# Altium PCB main.PcbDoc (part 1 of 2)
Units mm, origin at the board's own origin, x right, y up, seen from the top; angles counter-clockwise.
Board outline 40.5 x 55.75 mm, 4 copper layers (Top Layer, Int1, Int2, Bottom Layer), stack 1.334 mm thick; 84 components, 154 nets, 493 pads, 303 vias.
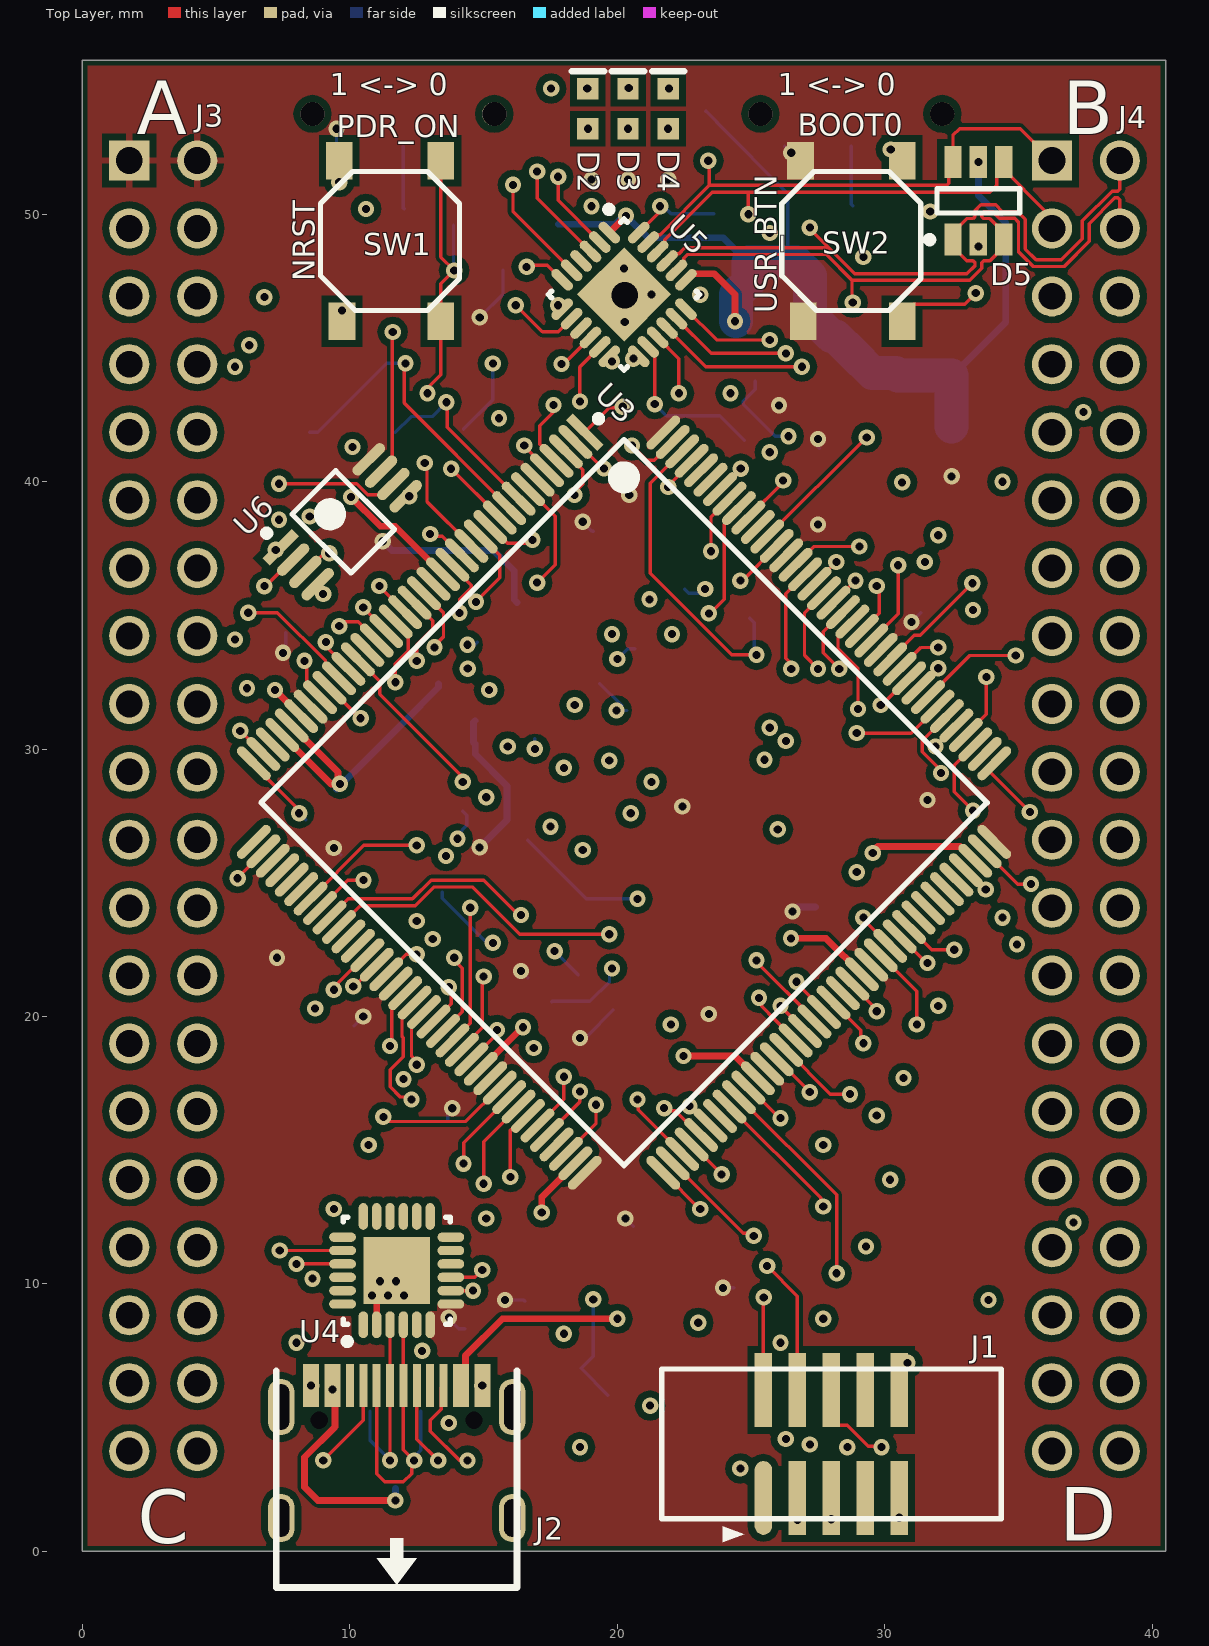
[diagram p0: Top Layer view]
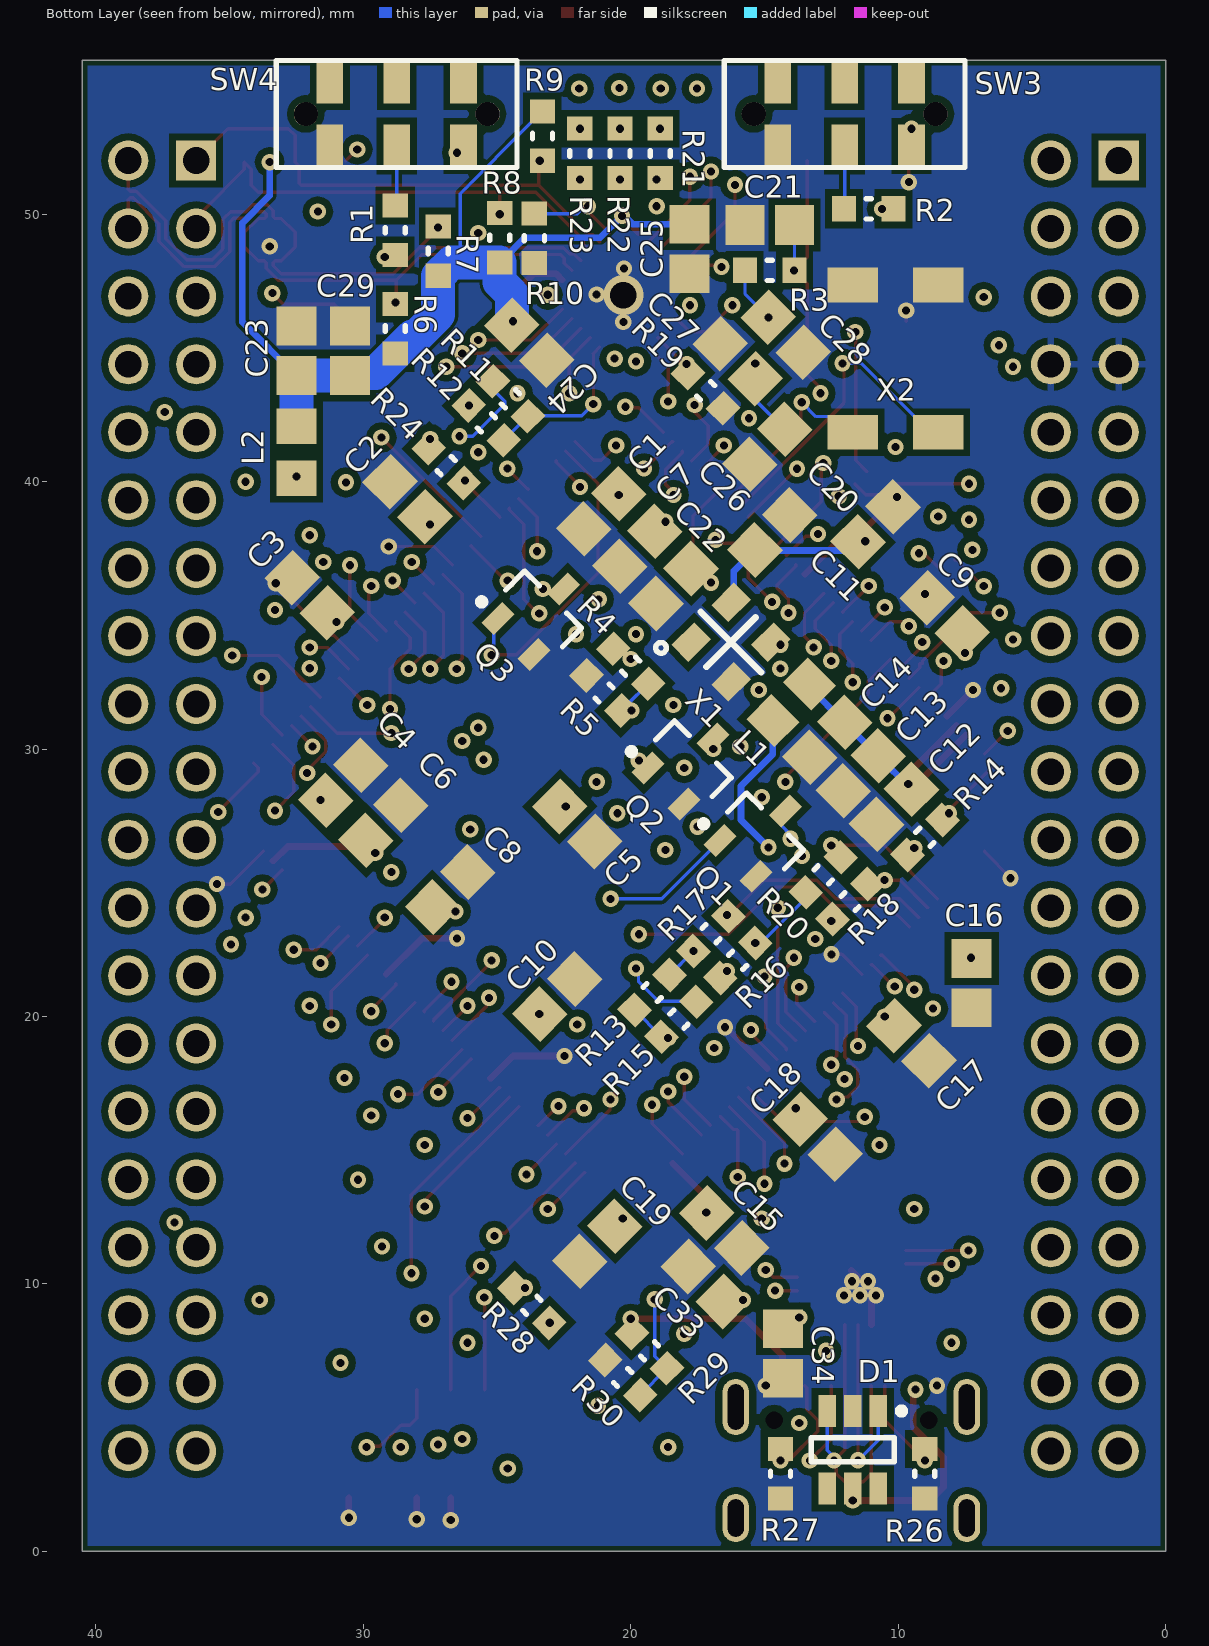
[diagram p1: Bottom Layer view, seen from below]
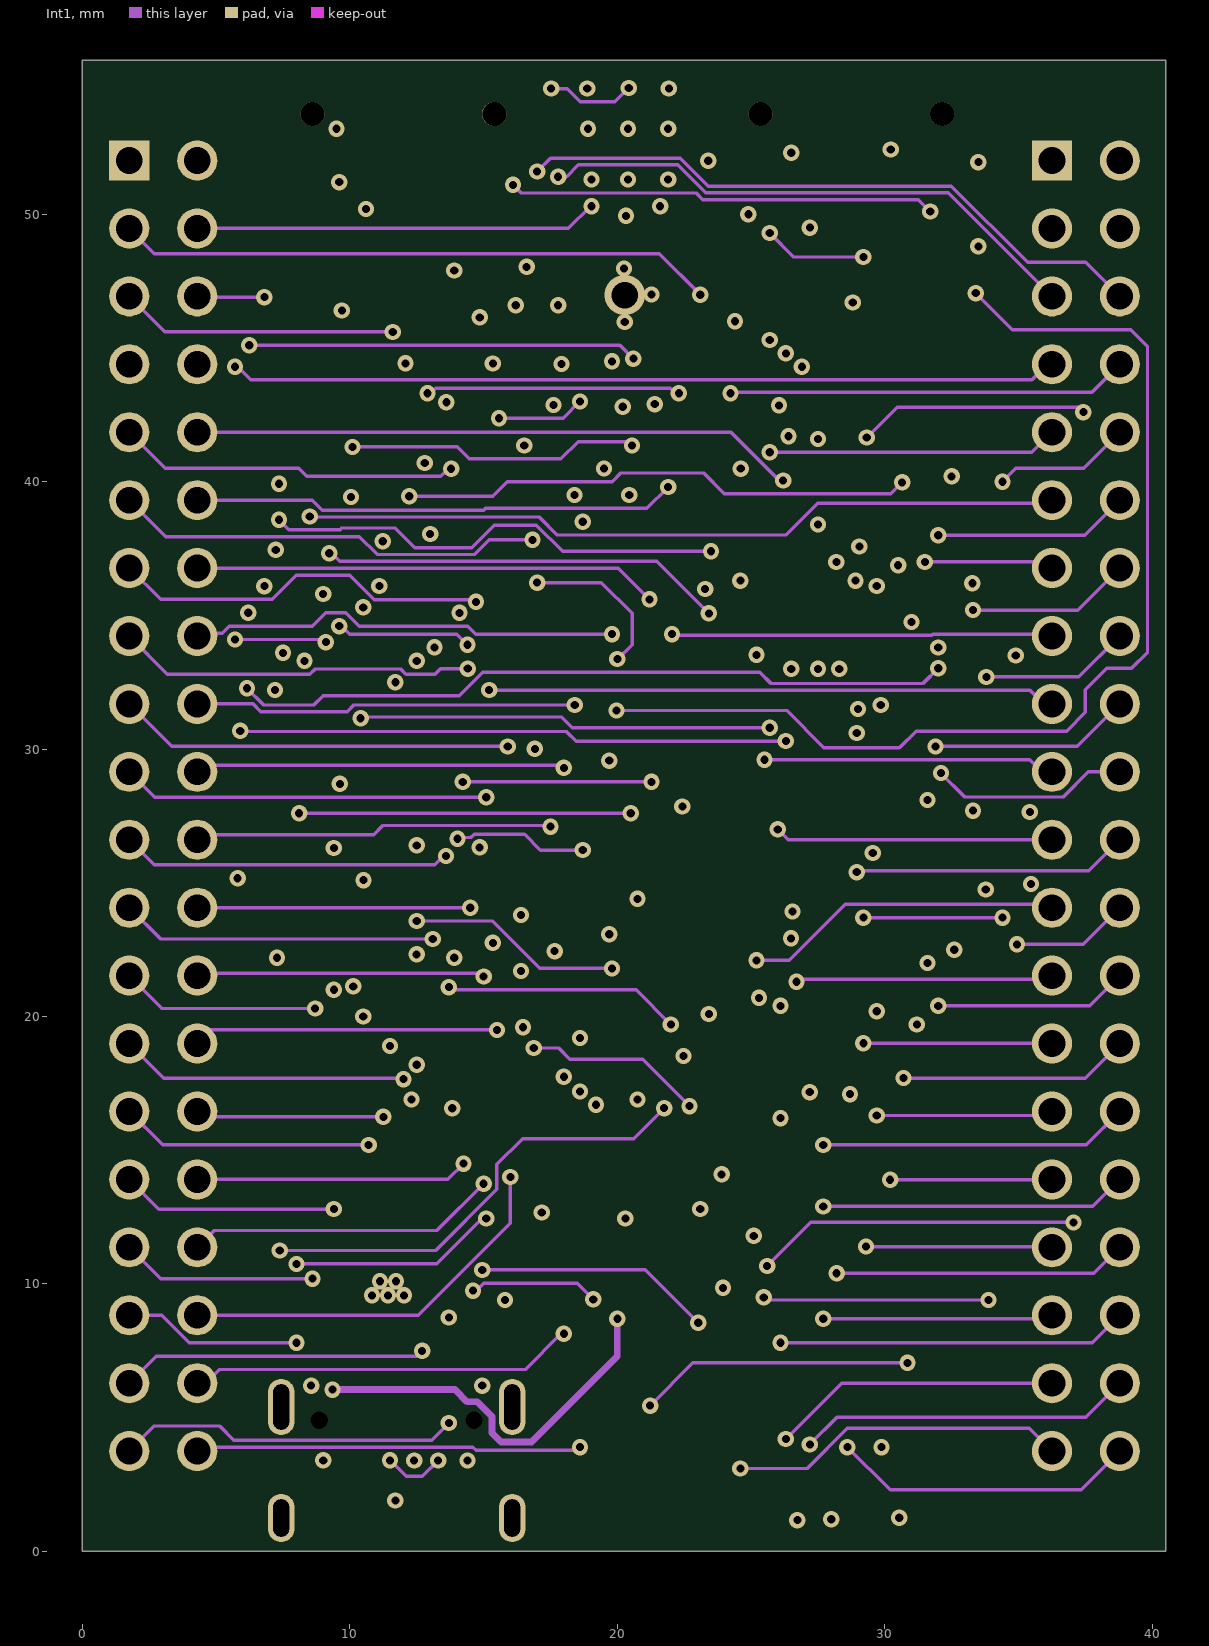
[diagram p2: Int1]
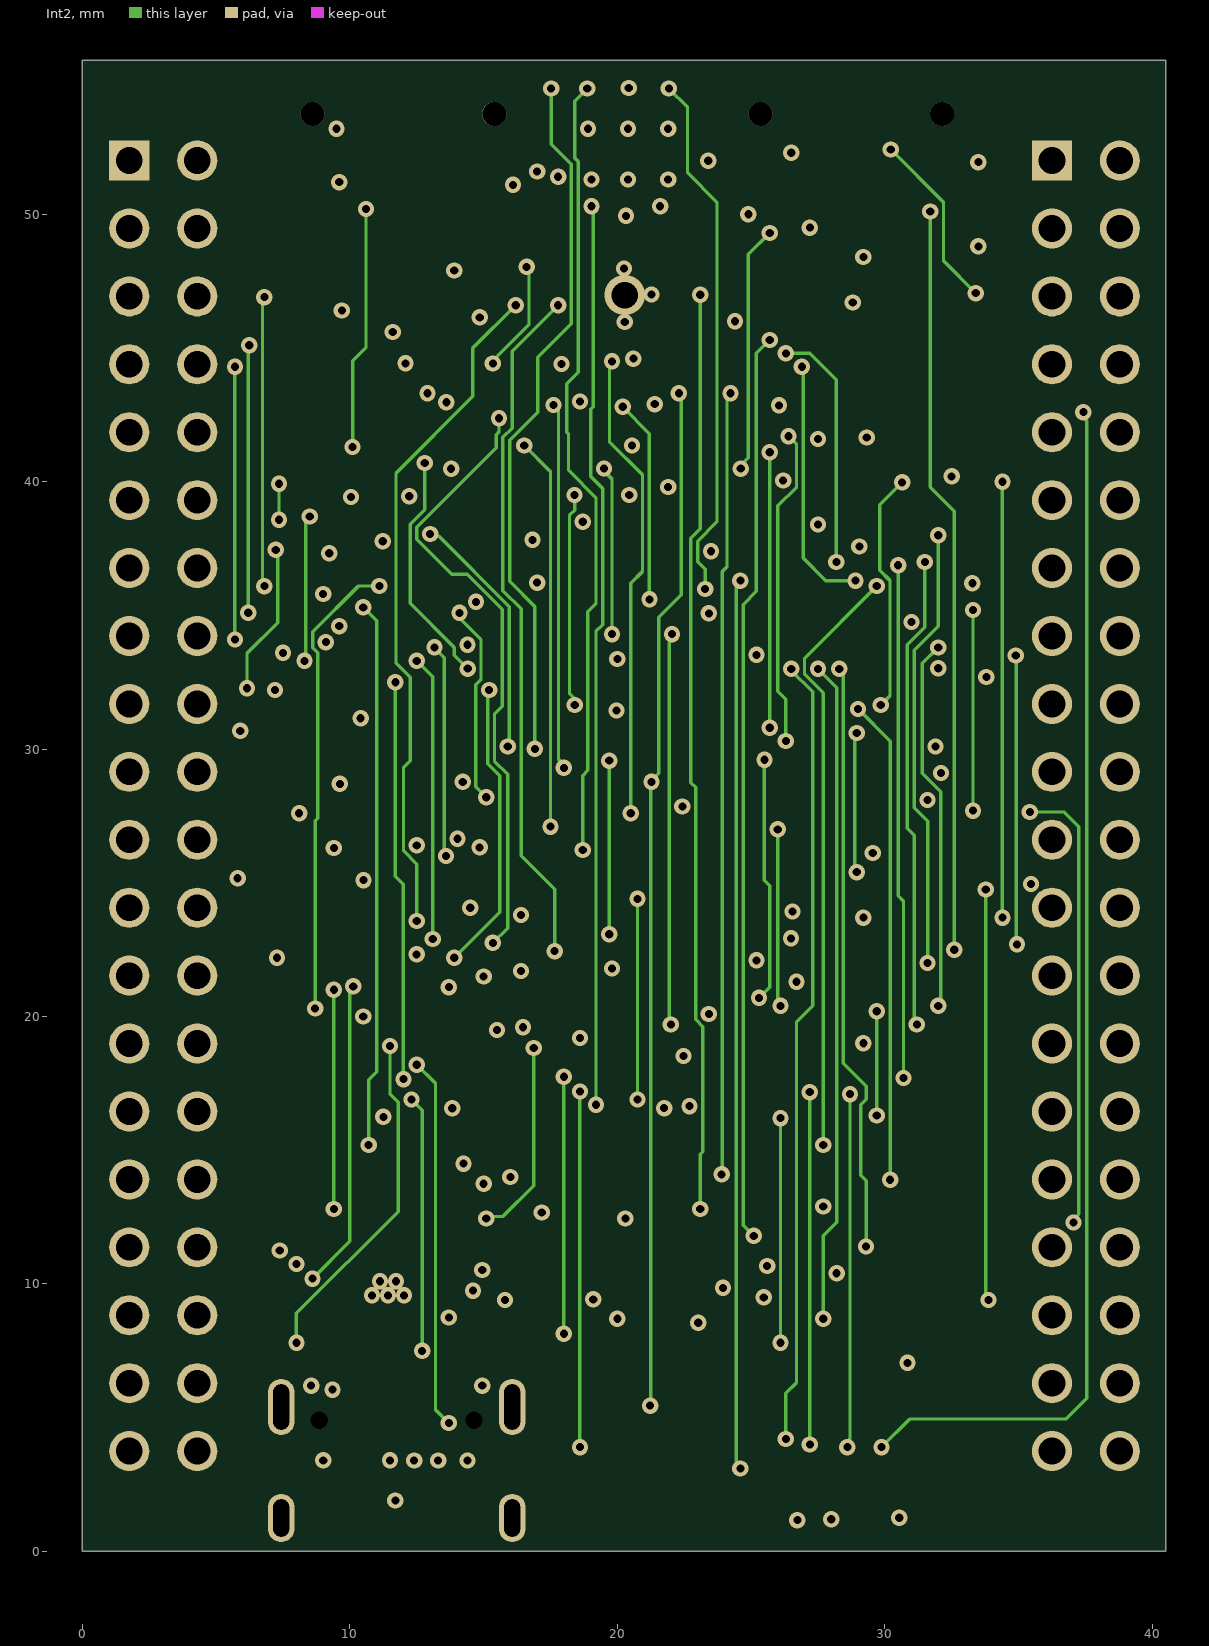
[diagram p3: Int2]
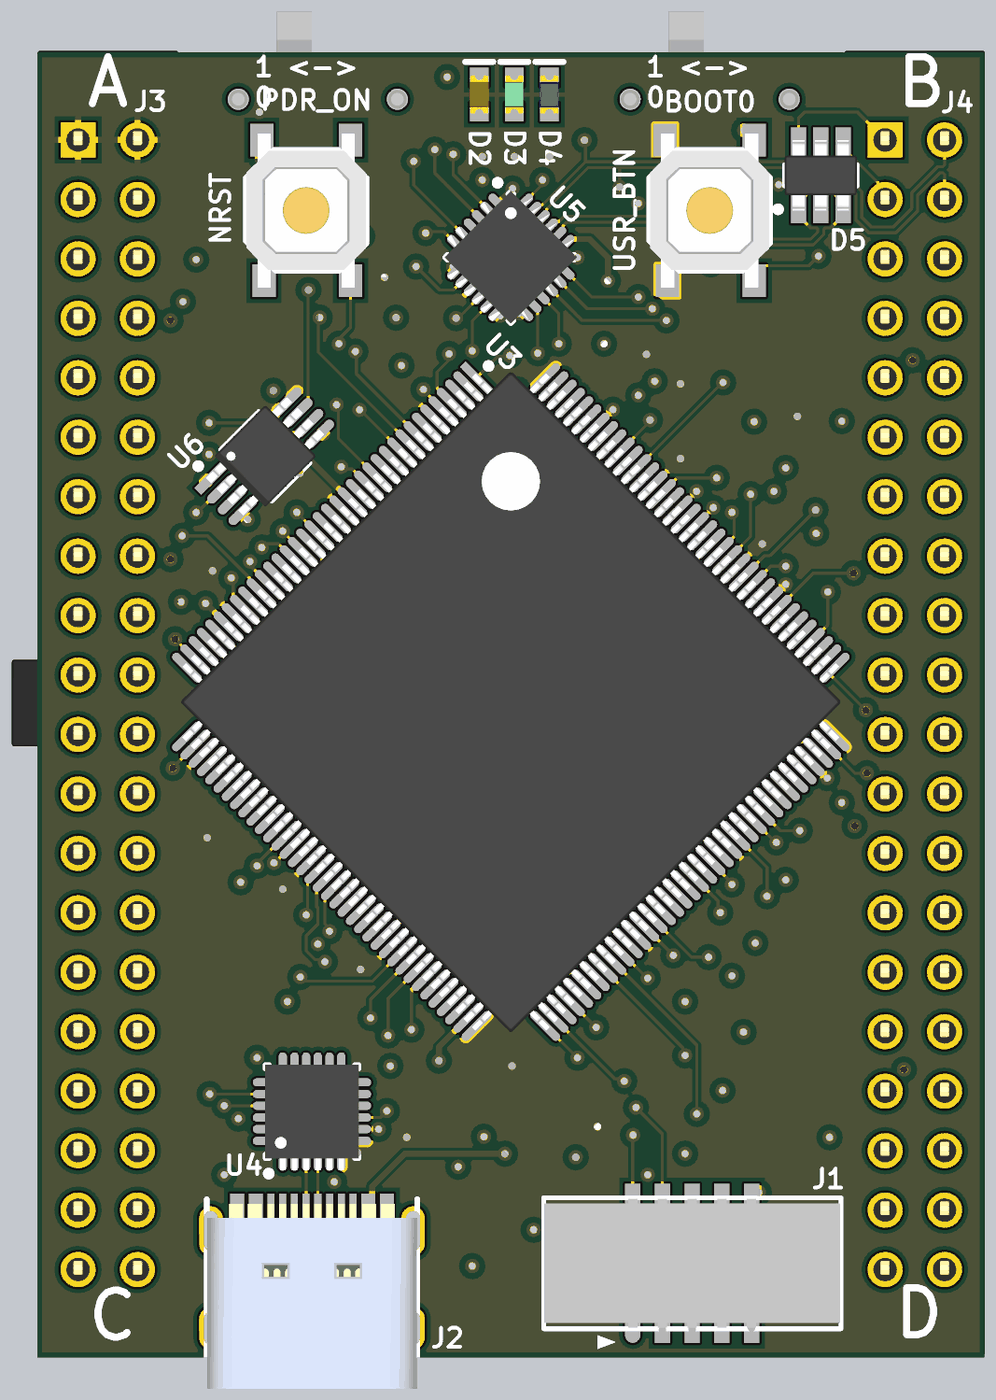
[diagram p5: 3D render of the assembled board from above, using the file's embedded part models]
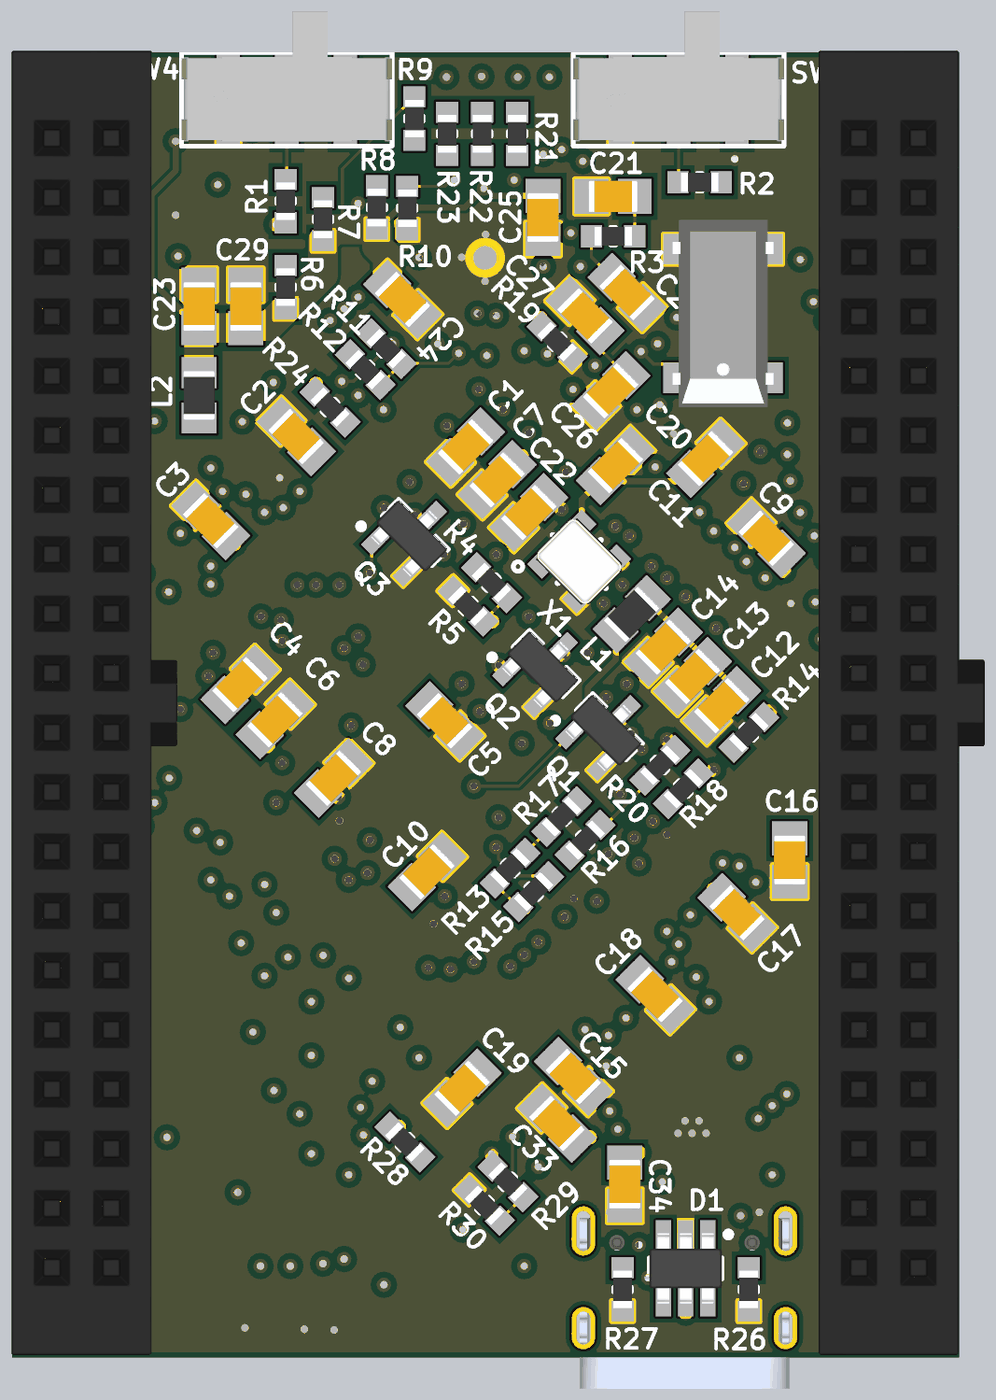
[diagram p6: 3D render of the assembled board from below, using the file's embedded part models]

## Layer stack, top to bottom
Top Solder: solder mask 0.0254, SM-001, Dk 4
Top Layer: signal copper 0.035
Dielectric 1: prepreg 0.1295, PP-017, Dk 4.3
Dielectric 2: prepreg 0.1295, PP-017, Dk 4.3
Int1: signal copper 0.0175
Dielectric 3: core 0.7112, Core-039, Dk 4.8
Int2: signal copper 0.0175
Dielectric 4: prepreg 0.1295, PP-017, Dk 4.3
Dielectric 5: prepreg 0.1295, PP-017, Dk 4.3
Bottom Layer: signal copper 0.035
Bottom Solder: solder mask 0.0254, SM-001, Dk 4

## Board outline
0,0 0,55.75 40.5,55.75 40.5,0

## Design rules (kind name [scope] priority, off if disabled: settings)
BoardOutlineClearance JLC_BoardOutlineClearance_Silk [OnLayer('Top Overlay')  or   OnLayer('Bottom Overlay')] p1: gap=0 ignorepadtopadclearanceinfootprint=FALSE
BoardOutlineClearance JLC_BoardOutlineClearance_Single [All] p2: gap=0.4 ignorepadtopadclearanceinfootprint=FALSE except(0: Arc-SplitContinuation Track-SplitContinuation SMDPad-SplitContinuation THPad-SplitContinuation Via-SplitContinuation Fill-SplitContinuation Poly-SplitContinuation Region-SplitContinuation Text-SplitContinuation; 0.2: Arc-OutlineEdge Track-OutlineEdge SMDPad-OutlineEdge THPad-OutlineEdge Via-OutlineEdge Fill-OutlineEdge Poly-OutlineEdge Region-OutlineEdge Text-OutlineEdge)
BoardOutlineClearance JLC_BoardOutlineClearance_Panel [All] p3: gap=0.4 ignorepadtopadclearanceinfootprint=FALSE except(0: Arc-SplitContinuation Track-SplitContinuation SMDPad-SplitContinuation THPad-SplitContinuation Via-SplitContinuation Fill-SplitContinuation Poly-SplitContinuation Region-SplitContinuation Text-SplitContinuation)
Clearance JLC_Clearance_SB [(HasFootprint('0603 Solder Bridge-Footprint-1'))] p1: gap=0.127 ignorepadtopadclearanceinfootprint=FALSE except(0: Fill-Hole Poly-Hole Region-Hole Text-Hole; 0.254: SMDPad-Fill SMDPad-Poly SMDPad-Region THPad-Fill THPad-Poly THPad-Region Via-Fill Via-Poly Via-Region)
Clearance JLC_Clearance_Top [All] p2: gap=0.127 ignorepadtopadclearanceinfootprint=FALSE except(0: Fill-Hole Poly-Hole Region-Hole Text-Hole; 0.254: SMDPad-Fill SMDPad-Poly SMDPad-Region THPad-Fill THPad-Poly THPad-Region Via-Fill Via-Poly Via-Region Fill-Fill Fill-Poly Fill-Region Poly-Poly Poly-Region Region-Region)
ComponentClearance JLC_ComponentClearance [All] p1: gap=0 collisioncheckmode=3 verticalgap=0 showdistances=FALSE
ComponentOrientations JLC_ComponentOrientations [All] p1: allowedrotations=32
DiffPairsRouting [All] p1: maxlimit=0.254 minlimit=0.127 mostfreqgap=0.127 toplayer_minwidth=0.127 toplayer_maxwidth=0.381 toplayer_prefwidth=0.127 midlayer1_minwidth=0.127 midlayer1_maxwidth=0.381 midlayer1_prefwidth=0.127 midlayer2_minwidth=0.127 midlayer2_maxwidth=0.381 midlayer2_prefwidth=0.127 bottomlayer_minwidth=0.127 bottomlayer_maxwidth=0.381 bottomlayer_prefwidth=0.127 maxuncoupledlength=12.7
Height JLC_Height [All] p1: minheight=0 maxheight=2539.975 prefheight=12.7
HoleSize JLC_HoleSize [All] p1: absolutevalues=TRUE maxlimit=1000 minlimit=0.305 maxpercent=80.000 minpercent=20.000
HoleToHoleClearance JLC_HoleToHoleClearance [All] p1: gap=0.305 allowstackedmicrovias=TRUE
MinimumAnnularRing JLC_MinimumAnnularRing [All] p1: minimumring=0.076
MinimumSolderMaskSliver JLC_MinimumSolderMaskSliver [All] p1: minsoldermaskwidth=0
PolygonConnect [All] p1: connectstyle=Relief reliefconductorwidth=0.254 reliefentries=4 polygonreliefangle="90 Angle" airgapwidth=0.254
RoutingVias JLC_RoutingVias [All] p1: holewidth=0.381 width=0.635 viastyle="Through Hole" minholewidth=0.305 minwidth=0.61 maxholewidth=6.299 maxwidth=12.7
SilkToSilkClearance JLC_SilkToSilkClearance [All] p1: silktosilkclearance=0
SilkToSolderMaskClearance JLC_SilkToSolderMaskClearance [IsPad] p1: minsilkscreentomaskgap=0 clearancetoexposedcopper=TRUE
SolderMaskExpansion [All] p1: expansion=0.102 istentingtop=FALSE
Width JLC_Width [All] p1: maxlimit=12.7 minlimit=0.127 preferedwidth=0.254
22 further rules are at their usual default settings.

## Classes and differential pairs
component class vcp: C33 C34 D1 J2 R26 R27 R28 R29 R30 U4
component class mcu: C1 C2 C3 C4 C5 C6 C7 C8 C9 C10 C11 C12 C13 C14 C15 C16 C17 C18 C19 C20 C21 C22 D2 D3 D4 J1 L1 Q1 Q2 Q3 R1 R2 R3 R4 R5 R21 R22 R23 SW1 SW2 SW3 SW4 U3 X1 X2
component class header: J3 J4
component class eth: C23 C24 C25 C26 C27 C28 C29 D5 L2 R6 R7 R8 R9 R10 R11 R12 R13 R14 R15 R16 R17 R18 R19 R20 U5
component class bkpln: R24 U6
differential pair TD: +TD_P -TD_N
differential pair RD: +RD_P -RD_N

## Components (designator, comment, footprint, x,y, rotation, side; value= is the part's Value field where it differs from the comment)
C1 "100nF" "CAP 0805 L" 21.1,38.9 r315 bottom
C2 "100nF" "CAP 0805 L" 28.346,39.346 r45 bottom
C3 "100nF" "CAP 0805 L" 32,35.75 r45 bottom
C4 "100nF" "CAP 0805 L" 30.75,28.75 r135 bottom
C5 "4u7F" "CAP 0805 L" 22,27.2 r225 bottom
C6 "2u2F" "CAP 0805 L" 29.25,27.25 r135 bottom
C7 "1uF" "CAP 0805 L" 19.75,37.5 r135 bottom
C8 "100nF" "CAP 0805 L" 26.75,24.75 r135 bottom
C9 "100nF" "CAP 0805 L" 8.25,35 r225 bottom
C10 "100nF" "CAP 0805 L" 22.75,20.75 r135 bottom
C11 "100nF" "CAP 0805 L" 10.846,38.404 r315 bottom
C12 "100nF" "CAP 0805 L" 10.154,27.846 r135 bottom
C13 "2uF" "CAP 0805 L" 11.404,29.096 r135 bottom
C14 "10nF" "CAP 0805 L" 12.654,30.346 r135 bottom
C15 "2u2F" "CAP 0805 L" 16.5,12 r45 bottom
C16 "100nF" "CAP 0805 L" 7.25,21.25 r90 bottom
C17 "100nF" "CAP 0805 L" 9.5,19 r45 bottom
C18 "100nF" "CAP 0805 L" 13,15.5 r45 bottom
C19 "100nF" "CAP 0805 L" 21.25,11.5 r135 bottom
C20 "100nF" "CAP 0805 L" 14.7,38.1 r135 bottom
C21 "100nF" "CAP 0805 L" 14.8,49.6 r0 bottom
C22 "100nF" "CAP 0805 L" 18.4,36.1 r135 bottom
C23 "10uF" "CAP 0805 L" 32.5,44.9 r270 bottom
C24 "100nF" "CAP 0805 L" 23.8,45.2 r225 bottom
C25 "100nF" "CAP 0805 L" 17.8,48.7 r270 bottom
C26 "470pF" "CAP 0805 L" 14.9,41.3 r135 bottom
C27 "1uF" "CAP 0805 L" 16,44.5 r225 bottom
C28 "100nF" "CAP 0805 L" 14.2,45.5 r45 bottom
C29 "100nF" "CAP 0805 L" 30.5,44.9 r270 bottom
C33 "4u7" "CAP 0805 L" 17.2,10 r225 bottom
C34 "100n" "CAP 0805 L" 14.3,7.4 r90 bottom
D1 "TVS Steering" SC-74 11.7,3.8 r270 bottom
D2 "RED" "LED 0603 RED" 18.9,53.95 r270 top
D3 "GREEN" "LED 0603 GREEN" 20.4,53.95 r270 top
D4 "BLUE" "LED 0603 BLUE" 21.9,53.95 r270 top
D5 "TVS Steering" SC-74 33.5,50.5 r90 top
J1 "SWD" "CONN IDC 10P P0.05" 25.46,4.02 r0 top
J2 "CONN USB C 12p" "CONN USB C 12P" 11.75,1.25 r0 top
J3 "2x20 F" "CONN HDR 2x20 F BOT" 1.75,52.01 r0 top
J4 "2x20 F" "CONN HDR 2x20 F BOT" 36.25,52.01 r0 top
L1 "22uH" "IND 0805 L" 14,31.75 r315 bottom
L2 "22uH" "IND 0805 L" 32.5,41.1 r270 bottom
Q1 "60V 360mA 0R9" SOT23 15.1,26.8 r135 bottom
Q2 "60V 360mA 0R9" SOT23 17.8,29.5 r135 bottom
Q3 "60V 360mA 0R9" SOT23 23.4,35.1 r135 bottom
R1 "10K" "RES 0603 L" 28.8,49.4 r90 bottom
R2 "10K" "RES 0603 L" 11.1,50.2 r0 bottom
R3 "10K" "RES 0603 L" 14.8,47.9 r0 bottom
R4 "10K" "RES 0603 L" 20,33.1 r225 bottom
R5 "10K" "RES 0603 L" 21,32.1 r225 bottom
R6 "49R9" "RES 0603 L" 28.8,45.725 r270 bottom
R7 "49R9" "RES 0603 L" 27.2,48.625 r270 bottom
R8 "49R9" "RES 0603 L" 24.9,49.125 r270 bottom
R9 "49R9" "RES 0603 L" 23.3,52.925 r90 bottom
R10 "12k1" "RES 0603 L" 23.6,49.1 r90 bottom
R11 "33" "RES 0603 L" 24.5,43.1 r225 bottom
R12 "10k" "RES 0603 L" 25.4,42.2 r45 bottom
R13 "10k" "RES 0603 L" 19.2,20.9 r315 bottom
R14 "1k5" "RES 0603 L" 9,26.7 r135 bottom
R15 "10k" "RES 0603 L" 18.2,19.9 r315 bottom
R16 "10k" "RES 0603 L" 16,22.1 r315 bottom
R17 "33" "RES 0603 L" 17,23.1 r315 bottom
R18 "33" "RES 0603 L" 11.8,24.3 r315 bottom
R19 "10k" "RES 0603 L" 17.2,43.4 r45 bottom
R20 "33" "RES 0603 L" 12.8,25.3 r315 bottom
R21 "330" "RES 0603 L" 18.9,52.275 r270 bottom
R22 "330" "RES 0603 L" 20.4,52.275 r270 bottom
R23 "330" "RES 0603 L" 21.9,52.275 r270 bottom
R24 "10k" "RES 0603 L" 26.9,40.6 r45 bottom
R26 "10k" "RES 0603 L" 9,2.9 r270 bottom
R27 "10k" "RES 0603 L" 14.4,2.9 r90 bottom
R28 "1k" "RES 0603 L" 23.7,9.2 r225 bottom
R29 "22.1k" "RES 0603 L" 19.3,7.5 r225 bottom
R30 "47.5k" "RES 0603 L" 20.3,6.5 r45 bottom
SW1 "SW Flat 5mm Tactile" "SW 5MM TACTILE" 11.5,49 r90 top
SW2 "SW Flat 5mm Tactile" "SW 5MM TACTILE" 28.75,49 r90 top
SW3 "slide dpdt" "SW SIDE SLIDE DPDT" 12,53.75 r0 bottom
SW4 "slide dpdt" "SW SIDE SLIDE DPDT" 28.75,53.75 r0 bottom
U3 "STM32H753ZIT6" LQFP144 20.25,28 r315 top
U4 "CP2102N" VQFN24 11.75,10.5 r90 top
U5 "LAN8742A" VQFN24 20.25,47 r315 top
U6 "TCA4311A" SSOP-8 9.75,38.5 r45 top
X1 "DSC6011CI2A-008.0000" "XO 3.2x2.5" 16.25,34 r135 bottom
X2 "32.768kHz" "XTAL 8.0x3.8" 10.1,44.6 r90 bottom

## Footprints (in the part's own frame and the unit in brackets; to place one, negate y for a bottom-side part, rotate by r counter-clockwise, add the part's x,y. Pads: shape width x height; smd on the part's side, far side on the other; paste and mask are expansions set on the pad)
"CAP 0805 L" [mm] "Chip Capacitor, 2-Leads, Body 2.00x1.25mm, IPC Low Density"
  rect 1.45x1.5 smd: 1(-0.925,0) 2(0.925,0)
  body extent -1.05,-0.68 1.05,0.67, height 1.35
"CONN HDR 2x20 F BOT" [mm]
  rect 1.5x1.5 hole 1: 1(0,0)
  round 1.5 hole 1: 2(2.54,0) 3(0,-2.54) 4(2.54,-2.54) 5(0,-5.08) 6(2.54,-5.08) 7(0,-7.62) 8(2.54,-7.62) 9(0,-10.16) 10(2.54,-10.16) 11(0,-12.7) 12(2.54,-12.7) 13(0,-15.24) 14(2.54,-15.24) 15(0,-17.78) 16(2.54,-17.78) 17(0,-20.32) 18(2.54,-20.32) 19(0,-22.86) 20(2.54,-22.86) 21(0,-25.4) 22(2.54,-25.4) 23(0,-27.94) 24(2.54,-27.94) 25(0,-30.48) 26(2.54,-30.48) 27(0,-33.02) 28(2.54,-33.02) 29(0,-35.56) 30(2.54,-35.56) 31(0,-38.1) 32(2.54,-38.1) 33(0,-40.64) 34(2.54,-40.64) 35(0,-43.18) 36(2.54,-43.18) 37(0,-45.72) 38(2.54,-45.72) 39(0,-48.26) 40(2.54,-48.26)
  body extent -2.83,-51.91 4.27,3.81, height 2.8
"CONN IDC 10P P0.05" [mm]
  oval 0.65x2.76 smd: 1(0,-2.02)
  rect 0.65x2.76 smd: 2(0,2.02) 3(1.27,-2.02) 4(1.27,2.02) 5(2.54,-2.02) 6(2.54,2.02) 7(3.81,-2.02) 8(3.81,2.02) 9(5.08,-2.02) 10(5.08,2.02)
  silkscreen extent -3.8,-3.67 8.9,2.8, body extent -3.78,-2.75 8.87,2.75, height 5.61
"CONN USB C 12P" [mm]
  rect 0.6x1.6 smd: A1/B12(-3.2,4.95) A4/B9(-2.4,4.95) A9/B4(2.4,4.95) A12/B1(3.2,4.95)
  rect 0.3x1.6 smd: A5(-1.25,4.95) A6(-0.25,4.95) A7(0.25,4.95) A8(-1.75,4.95) B5(1.75,4.95) B6(0.75,4.95) B7(-0.75,4.95) B8(1.25,4.95)
  oval 1x1.8 hole 0.6 slot 1.4 at 90 deg: ""(-4.32,0) ""(4.32,0)
  oval 1x2.1 hole 0.6 slot 1.7 at 90 deg: ""(-4.32,4.15) ""(4.32,4.15)
  round 0 hole 0.65 unplated: ""(-2.89,3.65) ""(2.89,3.65)
  silkscreen extent -4.5,-2.6 4.5,5.5, body extent -4.47,-2.6 4.47,5.3, height 3.22
"IND 0805 L" [mm] "Chip Inductor, 2-Leads, Body 2.00x1.25mm, IPC Low Density"
  rect 1.32x1.49 smd: 1(-0.97,0) 2(0.97,0)
  body extent -1.05,-0.68 1.05,0.67, height 1.35
"LED 0603 BLUE" [mm]
  rect 0.8x0.8 smd: 1(-0.75,0) 2(0.75,0)
  silkscreen extent -1.4,-0.6 -1.4,0.6, body extent -0.8,-0.39 0.8,0.39, height 0.7
"LED 0603 GREEN" [mm]
  rect 0.8x0.8 smd: 1(-0.75,0) 2(0.75,0)
  silkscreen extent -1.4,-0.6 -1.4,0.6, body extent -0.8,-0.39 0.8,0.39, height 0.7
"LED 0603 RED" [mm]
  rect 0.8x0.8 smd: 1(-0.75,0) 2(0.75,0)
  silkscreen extent -1.4,-0.6 -1.4,0.6, body extent -0.8,-0.39 0.8,0.39, height 0.7
LQFP144 [mm] "TSQFP, 144-Leads, Body 20.00x20.00mm, Pitch 0.50mm, IPC Low Density"
  rect 1.65x0.35 smd: 1(-10.825,8.75)
  oval 1.65x0.35 smd: 2(-10.825,8.25) 3(-10.825,7.75) 4(-10.825,7.25) 5(-10.825,6.75) 6(-10.825,6.25) 7(-10.825,5.75) 8(-10.825,5.25) 9(-10.825,4.75) 10(-10.825,4.25) 11(-10.825,3.75) 12(-10.825,3.25) 13(-10.825,2.75) 14(-10.825,2.25) 15(-10.825,1.75) 16(-10.825,1.25) 17(-10.825,0.75) 18(-10.825,0.25) 19(-10.825,-0.25) 20(-10.825,-0.75) 21(-10.825,-1.25) 22(-10.825,-1.75) 23(-10.825,-2.25) 24(-10.825,-2.75) 25(-10.825,-3.25) 26(-10.825,-3.75) 27(-10.825,-4.25) 28(-10.825,-4.75) 29(-10.825,-5.25) 30(-10.825,-5.75) 31(-10.825,-6.25) 32(-10.825,-6.75) 33(-10.825,-7.25) 34(-10.825,-7.75) 35(-10.825,-8.25) 36(-10.825,-8.75) 73(10.825,-8.75) 74(10.825,-8.25) 75(10.825,-7.75) 76(10.825,-7.25) 77(10.825,-6.75) 78(10.825,-6.25) 79(10.825,-5.75) 80(10.825,-5.25) 81(10.825,-4.75) 82(10.825,-4.25) 83(10.825,-3.75) 84(10.825,-3.25) 85(10.825,-2.75) 86(10.825,-2.25) 87(10.825,-1.75) 88(10.825,-1.25) 89(10.825,-0.75) 90(10.825,-0.25) 91(10.825,0.25) 92(10.825,0.75) 93(10.825,1.25) 94(10.825,1.75) 95(10.825,2.25) 96(10.825,2.75) 97(10.825,3.25) 98(10.825,3.75) 99(10.825,4.25) 100(10.825,4.75) 101(10.825,5.25) 102(10.825,5.75) 103(10.825,6.25) 104(10.825,6.75) 105(10.825,7.25) 106(10.825,7.75) 107(10.825,8.25) 108(10.825,8.75)
  oval 0.35x1.65 smd: 37(-8.75,-10.825) 38(-8.25,-10.825) 39(-7.75,-10.825) 40(-7.25,-10.825) 41(-6.75,-10.825) 42(-6.25,-10.825) 43(-5.75,-10.825) 44(-5.25,-10.825) 45(-4.75,-10.825) 46(-4.25,-10.825) 47(-3.75,-10.825) 48(-3.25,-10.825) 49(-2.75,-10.825) 50(-2.25,-10.825) 51(-1.75,-10.825) 52(-1.25,-10.825) 53(-0.75,-10.825) 54(-0.25,-10.825) 55(0.25,-10.825) 56(0.75,-10.825) 57(1.25,-10.825) 58(1.75,-10.825) 59(2.25,-10.825) 60(2.75,-10.825) 61(3.25,-10.825) 62(3.75,-10.825) 63(4.25,-10.825) 64(4.75,-10.825) 65(5.25,-10.825) 66(5.75,-10.825) 67(6.25,-10.825) 68(6.75,-10.825) 69(7.25,-10.825) 70(7.75,-10.825) 71(8.25,-10.825) 72(8.75,-10.825) 109(8.75,10.825) 110(8.25,10.825) 111(7.75,10.825) 112(7.25,10.825) 113(6.75,10.825) 114(6.25,10.825) 115(5.75,10.825) 116(5.25,10.825) 117(4.75,10.825) 118(4.25,10.825) 119(3.75,10.825) 120(3.25,10.825) 121(2.75,10.825) 122(2.25,10.825) 123(1.75,10.825) 124(1.25,10.825) 125(0.75,10.825) 126(0.25,10.825) 127(-0.25,10.825) 128(-0.75,10.825) 129(-1.25,10.825) 130(-1.75,10.825) 131(-2.25,10.825) 132(-2.75,10.825) 133(-3.25,10.825) 134(-3.75,10.825) 135(-4.25,10.825) 136(-4.75,10.825) 137(-5.25,10.825) 138(-5.75,10.825) 139(-6.25,10.825) 140(-6.75,10.825) 141(-7.25,10.825) 142(-7.75,10.825) 143(-8.25,10.825) 144(-8.75,10.825)
  silkscreen extent -10.95,-9.6 9.6,9.6, body extent -11,-11 11,11, height 1.6
"RES 0603 L" [mm] "Chip Resistor, 2-Leads, Body 1.60x0.80mm, IPC Low Density"
  rect 0.9x0.95 smd: 1(-0.925,0) 2(0.925,0)
  silkscreen extent -0.1,-0.38 0.1,0.38, body extent -0.8,-0.4 0.8,0.4, height 0.45
SC-74 [mm] "SOT23, 6-Leads, Body 3.00x2.75mm, Pitch 0.95mm, IPC Low Density"
  rect 1.2x0.65 smd: 1(-1.45,0.95) 2(-1.45,0) 3(-1.45,-0.95) 4(1.45,-0.95) 5(1.45,0) 6(1.45,0.95)
  silkscreen extent -1.57,-1.55 0.45,1.95, body extent -1.5,-1.55 1.5,1.55, height 1.1
SOT23 [mm] "SOT23, 3-Leads, Body 2.90x2.30mm, Pitch 0.95mm, IPC Low Density"
  rect 1.1x0.65 smd: 1(-1.25,0.95) 2(-1.25,-0.95) 3(1.25,0)
  silkscreen extent -1.37,-1.5 0.7,1.95, body extent -1.3,-1.5 1.3,1.5, height 1.1
SSOP-8 [mm] "TSOP, 8-Leads, Body 3.00x3.00mm, Pitch 0.65mm, IPC Low Density"
  rect 1.55x0.4 smd: 1(-2.325,0.975)
  oval 1.55x0.4 smd: 2(-2.325,0.325) 3(-2.325,-0.325) 4(-2.325,-0.975) 5(2.325,-0.975) 6(2.325,-0.325) 7(2.325,0.325) 8(2.325,0.975)
  silkscreen extent -2.45,-1.55 1.15,1.85, body extent -2.45,-1.55 2.45,1.55, height 1.1
"SW 5MM TACTILE" [mm]
  rect 1.4x1 smd: 1(-3,1.8) 1(3,1.9) 2(-3,-1.9) 2(3,-1.9)
  silkscreen extent -2.6,-2.6 2.6,2.6, body extent -3.29,-2.55 3.29,2.55, height 1.5
"SW SIDE SLIDE DPDT" [mm]
  rect 1x1.6 smd: 1(-2.5,-1.2) 2(0,-1.2) 3(2.5,-1.2) 4(-2.5,1.2) 5(0,1.2) 6(2.5,1.2)
  round 0.9 hole 0.9 unplated: ""(-3.4,0) ""(3.4,0)
  silkscreen extent -4.5,-2 4.5,2, body extent -4.5,-3.75 4.5,1.8, height 3.51
VQFN24 [mm] "PQFN, 24-Leads, Body 4.00x4.00mm, Pitch 0.50mm, Thermal Pad 2.50x2.50mm, IPC Medium Density"
  rect 2.5x2.5 smd: 0(0,0)
  oval 1x0.35 smd: 1(-2.025,1.25) 2(-2.025,0.75) 3(-2.025,0.25) 4(-2.025,-0.25) 5(-2.025,-0.75) 6(-2.025,-1.25) 13(2.025,-1.25) 14(2.025,-0.75) 15(2.025,-0.25) 16(2.025,0.25) 17(2.025,0.75) 18(2.025,1.25)
  oval 0.35x1 smd: 7(-1.25,-2.025) 8(-0.75,-2.025) 9(-0.25,-2.025) 10(0.25,-2.025) 11(0.75,-2.025) 12(1.25,-2.025) 19(1.25,2.025) 20(0.75,2.025) 21(0.25,2.025) 22(-0.25,2.025) 23(-0.75,2.025) 24(-1.25,2.025)
  silkscreen extent -2.77,-2 2,2, body extent -2.5,-2.5 2.5,2.5, height 1
"XO 3.2x2.5" [mm]
  rect 1.2x0.9 smd: 1(-1.05,1.05) 2(-1.05,-1.05) 3(1.05,-1.05) 4(1.05,1.05)
  silkscreen extent -2.2,-1.6 1.3,1.9, body extent -1.25,-1.6 1.25,1.6, height 0.61
"XTAL 8.0x3.8" [mm]
  rect 1.3x1.9 smd: 1(-2.75,-1.6) 2(2.75,-1.6) 3(2.75,1.6) 4(-2.75,1.6)
  body extent -4,-2.16 4,2.16, height 2.62

## Part data
C1 C2 C3 C4 C5 C6 C7 C8 C9 C10 C11 C12 C13 C14 C15 C16 C17 C18 C19 C20 C21 C22 C23 C24 C25 C26 C27 C28 C29 C33 C34: library part "CAP 0805", "CAP 0805"
D1 D5: library part "DTVS 2Rail 4x", "CM1293A-04SO", Supplier Part Number 1=CM1293A-04SOOSCT-ND, Supplier 1=Digi-Key
D2: library part "LED 0603 RED"
D3: library part "LED 0603 GREEN"
D4: library part "LED 0603 BLUE"
J1: library part "CONN SWD IDC 0.05", "CONN SWD IDC 0.05", Supplier Part Number 1=1175-1735-ND, Supplier 1=Digi-Key
J2: "USB - Type C Female 12 SMD USB Connectors RoHS", LCSC Part #=C167321
J3 J4: library part "CONN Header 2x20 F", "CONN Header 2x20 F", Supplier Part Number 1=S9200-ND, Supplier 1=Digi-Key
L1 L2: library part "IND 0805", "IND 0805"
Q1 Q2 Q3: library part "FET 60V 360mA 0R9", "PMN20ENAX", Supplier Part Number 1=1727-1142-1-ND, Supplier 1=Digi-Key
R1 R2 R3 R4 R5 R6 R7 R8 R9 R10 R11 R12 R13 R14 R15 R16 R17 R18 R19 R20 R21 R22 R23 R24 R26 R27 R28 R29 R30: library part "RES 0603", "RES 0603"
SW3 SW4: library part "SW horz slide dpdt", "JS202011JAQN", Supplier Part Number 1=CKN10722CT-ND, Supplier 1=Digi-Key
U4: library part "IC USB UART CP2102N", Supplier Part Number 1=336-5888-1-ND, Supplier 1=Digi-Key
U5: library part "IC ETH PHY RMII", "LAN8742A-CZ-TR / LAN8742AI-CZ-TR"
U6: library part "IC I2C HOTSWAP BUF", Supplier Part Number 1=296-28328-1-ND, Supplier 1=Digi-Key
X1: library part "XO MEMS 8MHz"
X2: library part "XTAL 32.768kHz", "RSM200S-32.768-12.5-10PPM-NPB"

## Via types
v1: diameter 0.61, hole 0.305, Top Layer to Bottom Layer, tented both sides, 302 vias
v2: diameter 1.5, hole 1, Top Layer to Bottom Layer, 1 vias

## Nets (pads, with @x,y where several pads share a name; then routed paths per layer and width w, separated by ;. In a path a pad name is that pad's centre, name@x,y a point inside that pad or via, vN(x,y) a via of type N, cw(c..) or ccw(c..) an arc to the next point about the centre after c; other vN are vias at no path point)
3V3: C1.1 C2.1 C3.1 C4.1 C5.1 C7.2 C8.1 C9.2 C10.1 C11.2 C16.2 C17.2 C18.2 C19.2 C20.1 C28.2 C33.2 C34.2 J3.1 J3.2 L1.2 L2.2 R3.2 R12.2 R13.2 R14.1 R15.2 R16.2 R21.2 R22.2 R23.2 R24.2 R28.1 SW2.1 SW3.4 SW4.4 U3.6 U3.17 U3.30 U3.39 U3.52 U3.62 U3.72 U3.84 U3.95 U3.108 U3.121 U3.131 U3.144 U4.6 U4.7 U5.9 U6.8 X1.4 | length 24.9
  Bottom Layer w0.127: C16.2@7.25,22.175 v1(7.275,22.2) ; v1(7.5,33.6) 7.596,33.696 C9.2@7.596,34.346 ; v1(9.4,26.3) R14.1@9.654,26.046 ; SW3.4@9.5,52.55 v1(9.5,53.2) ; C17.2@10.154,19.654 v1(10.5,20) ; C18.2@13.654,16.154 13.654,16.399 v1(13.827,16.572) ; v1(13.7,8.745) 13.7,8.7 14.075,8.325 C34.2@14.3,8.325 ; C28.2@14.854,46.154 v1(14.854,46.146) 15.725,47.017 R3.2@15.725,47.9 ; v1(15.8,9.4) 16.492,9.4 C33.2@16.546,9.346 ; v1(16.4,21.7) R16.2@16.654,21.446 ; v1(18.705,38.5) 19.051,38.154 C7.2@19.096,38.154 ; R15.2@18.854,19.246 R13.2@19.854,20.246 ; R21.2@18.9,51.35 18.95,51.3 v1(19.031,51.3) ; v1(20.3,12.45) C19.2@20.596,12.154 ; v1(20.4,51.3) R22.2@20.4,51.35 ; v1(20.446,39.505) C1.1@20.446,39.554 ; v1(21.9,51.3) R23.2@21.9,51.35 ; v1(22.43,27.854) C5.1@22.654,27.854 ; C10.1@23.404,20.096 v1(23.421,20.096) ; v1(23.954,9.854) R28.1@24.354,9.854 ; v1(26.046,42.854) R12.2@26.054,42.854 ; SW4.4@26.25,52.55 v1(26.5,52.3) ; v1(27.5,41.595) 27.5,41.308 R24.2@27.554,41.254 ; v1(31,34.75) C3.1@31.346,35.096 ; C4.1@31.404,28.096 v1(31.595,28.096) C4.1@31.625,28.126 ; L2.2@32.5,40.13 v1(32.5,40.2)
  Bottom Layer w0.254: v1(11.23,37.774) 11.576,37.428 15.336,37.428 C20.1@15.354,37.446 16.144,36.656 16.144,35.591 X1.4@16.25,35.485 ; L1.2@14.686,31.064 14.626,31.004 14.626,30.25 14.686,30.19 14.686,29.814 15.875,28.625 15.875,27.35 v1(14.85,26.325) ; v1(26.55,23.925) 26.721,24.096 C8.1@27.404,24.096
  other v1: 18.6,19.2 27.5,38.4
3V3_A: C23.2 C24.1 C25.1 C29.2 D5.5 L2.1 R6.2 R7.2 R8.2 R9.2 U5.1 U5.19 | length 42.9
  Top Layer w0.254: U5.1@19.702,49.316 v1(20.325,49.939) ; U5.19@22.566,47.548 22.796,47.778 23.622,47.778 24.4,47 v1(24.4,46)
  Bottom Layer w0.127: R9.2@23.3,53.85 23.325,53.85 23.711,53.463 23.711,53.438 26.375,50.775 26.375,48.525 26.7,48.2
  Bottom Layer w0.254: C25.1@17.8,49.625 19.915,49.625 20.229,49.939 v1(20.325,49.939) 21.139,49.125 23.95,49.125 24.875,48.2 R8.2@24.9,48.2 ; C23.2@32.5,43.975 32.525,43.975 34.525,45.975 34.525,49.675 33.5,50.7 v1(33.5,51.95)
  Bottom Layer w1.27: C24.1@24.436,46 24.436,47.009 24.9,47.472 R8.2@24.9,48.2 26.7,48.2 R7.2@27.2,47.7 27.2,46.247 28.009,45.438 28.162,45.438 R6.2@28.8,44.8 29.535,44.065 30.41,44.065 C29.2@30.5,43.975 C23.2@32.5,43.975 L2.1@32.5,42.07
25MHZ: U3.99 U5.5 | length 50.1
  Top Layer w0.127: v1(16.1,51.1) 16.1,50.089 U5.5@18.288,47.902 ; U3.99@30.91,23.351 31.76,22.5 v1(32.6,22.5)
  Int1 w0.127: v1(16.1,51.1) 16.405,50.795 22.945,50.795 23.195,50.546 31.254,50.546 v1(31.7,50.1)
  Int2 w0.127: v1(31.7,50.1) 31.7,39.8 32.6,38.9 v1(32.6,22.5)
BUS_EN: U3.117 U6.1 | length 33
  Top Layer w0.127: v1(7.225,37.45) 7.225,37.475 7.346,37.475 U6.1@7.417,37.545
  Int1 w0.127: v1(6.15,32.275) 6.775,31.65 8.65,31.65 9,32 14.096,32 14.971,32.875 25.325,32.875 25.746,32.454 31.429,32.454 v1(32,33.025)
  Int2 w0.127: v1(6.15,32.275) 6.15,33.575 7.295,34.72 7.295,37.38 v1(7.225,37.45)
BUS_INT: J3.10 R24.1 U3.135 | length 24.6
  Top Layer w0.127: U3.135@24.899,38.66 24.899,38.679 26.2,39.98 v1(26.2,40.045)
  Int1 w0.127: J3.10@4.29,41.85 24.25,41.85 26.075,40.025 26.18,40.025 v1(26.2,40.045)
BUS_RDY: U3.118 U6.5 | length 29.9
  Top Layer w0.127: U6.5@12.083,39.455 v1(12.22,39.455) ; v1(29.85,31.65) 29.88,31.65 30.879,32.649 U3.118@30.91,32.649
  Int1 w0.127: v1(12.22,39.455) 15.34,39.455 15.886,40 19.808,40 20.133,40.325 23.225,40.325 24,39.55 30.225,39.55 v1(30.65,39.975)
  Int2 w0.127: v1(29.85,31.65) 30.195,31.995 30.195,36.305 29.805,36.695 29.805,39.13 v1(30.65,39.975)
BUS_SCL: U3.136 U6.3 | length 20.7
  Top Layer w0.127: U6.3@8.336,36.626 9.035,37.325 v1(9.225,37.325) ; v1(23.421,35.075) 23.475,35.075 24,35.6 24,38.407 24.546,38.953 U3.136@24.546,39.013
  Int1 w0.127: v1(9.225,37.325) 9.325,37.325 9.625,37.025 21.471,37.025 v1(23.421,35.075)
BUS_SDA: U3.137 U6.6 | length 25.6
  Top Layer w0.127: v1(7.35,39.925) 10.248,39.925 10.665,39.508 11.217,39.508 U6.6@11.624,39.914 ; v1(23.5,37.4) 23.5,38.675 U3.137@24.192,39.367
  Int1 w0.127: v1(7.35,38.575) 7.721,38.204 9.633,38.204 9.698,38.27 11.68,38.27 12.417,37.533 14.558,37.533 15.4,38.375 16.975,38.375 17.95,37.4 v1(23.5,37.4)
  Int2 w0.127: v1(7.35,38.575) v1(7.35,39.925)
CRS_DV: R20.1 U3.43 | length 4.8
  Top Layer w0.127: U3.43@8.53,24.411 10.518,26.4 v1(12.5,26.4)
DBG_UART_RX: U3.78 U4.21 | length 24.8
  Top Layer w0.127: v1(8,10.75) U4.21@9.725,10.75 ; v1(22.7,16.65) 22.731,16.65 23.454,15.926 U3.78@23.485,15.926
  Int1 w0.127: v1(8,10.75) 13.25,10.75 14.972,12.472 14.995,12.45 v1(15.1,12.45) ; v1(16.875,18.825) 17.8,18.825 18.225,18.4 20.95,18.4 v1(22.7,16.65)
  Int2 w0.127: v1(15.1,12.45) 15.176,12.525 15.725,12.525 16.875,13.675 v1(16.875,18.825)
DBG_UART_TX: U3.77 U4.20 | length 21.3
  Top Layer w0.127: v1(7.375,11.25) U4.20@9.725,11.25 ; v1(21.75,16.575) 21.842,16.483 22.167,16.483 23.077,15.573 U3.77@23.131,15.573
  Int1 w0.127: v1(7.375,11.25) 13.2,11.25 15.495,13.545 15.495,14.47 16.46,15.435 20.61,15.435 v1(21.75,16.575)
DN: D1.3 J2.A7 J2.B7 U4.4 | length 12.6
  Top Layer w0.127: J2.B7@11,6.2 11,2.9 11.3,2.6 12,2.6 12.308,2.908 12.308,3.308 v1(12.4,3.4) 12,3.8 J2.A7@12,6.2 U4.4@12,8.475
  Bottom Layer w0.127: v1(12.4,3.4) 12.4,3.531 12.65,3.781 D1.3@12.65,5.25
DP: D1.1 J2.A6 J2.B6 U4.3 | length 12.7
  Top Layer w0.127: v1@11.5,3.4 v1(11.5,3.405) J2.A6@11.5,6.2 U4.3@11.5,8.475 ; J2.B6@12.5,6.2 12.5,4.2 v1(13.3,3.4)
  Int1 w0.127: v1(11.5,3.405) 12.1,2.805 12.705,2.805 v1(13.3,3.4)
  Bottom Layer w0.127: D1.1@10.75,5.25 10.75,4.155 v1(11.5,3.405)
ETH_MDC: U3.27 U5.13 | length 29.1
  Top Layer w0.127: v1(6.2,35.1) 7.285,35.1 9.088,33.297 9.088,33.212 9.107,33.193 9.193,33.193 9.193,33.047 U3.27@9.59,32.649
  Int1 w0.127: v1(6.234,45.1) 20.1,45.1 v1(20.6,44.6)
  Int2 w0.127: v1(6.2,35.1) 6.2,45.066 v1(6.234,45.1)
ETH_MDIO: R14.2 U3.36 U5.12 | length 33.3
  Top Layer w0.127: U3.36@6.408,29.467 6.408,29.407 8.1,27.715 v1(8.1,27.6) ; U5.12@19.702,44.684 19.702,44.598 v1(19.8,44.5) 19.8,44.6 U5.12@19.795,44.605
  Int1 w0.127: v1(8.1,27.6) v1(20.5,27.6)
  Int2 w0.127: v1(19.8,44.5) 19.705,44.405 19.705,41.495 20.941,40.259 20.941,36.641 20.5,36.2 v1(20.5,27.6)
  Bottom Layer w0.127: v1(8.1,27.6) R14.2@8.346,27.354
ETH_REF_CLK: R11.1 U3.35 | length 37
  Top Layer w0.127: v1(5.9,30.683) U3.35@6.762,29.821
  Int1 w0.127: v1(5.9,30.683) 5.923,30.659 18.097,30.659 18.456,30.3 v1(26.3,30.3)
  Int2 w0.127: v1(26.3,30.3) 26.3,31.865 26,32.165 26,39.1 26.7,39.8 26.7,41.4 v1(26.4,41.7)
  Bottom Layer w0.127: R11.1@25.154,43.754 25.154,43.454 24.703,43.003 24.703,42.897 25.9,41.7 v1(26.4,41.7)
ETH_RXD0: R18.1 U3.44 | length 2.1
  Top Layer w0.127: U3.44@8.883,24.058 9.925,25.1 v1(10.505,25.1)
ETH_RXD1: R17.1 U3.45 | length 8.3
  Top Layer w0.127: U3.45@9.237,23.704 9.932,24.4 12.341,24.4 13.041,25.1 15,25.1 16.3,23.8 v1(16.395,23.8)
ETH_TX_EN: U3.126 U5.16 | length 16.3
  Top Layer w0.127: U5.16@21.859,45.745 23.304,44.3 v1(26.9,44.3) ; U3.126@28.081,35.478 v1(28.904,36.3)
  Int2 w0.127: v1(26.9,44.3) 26.954,44.246 26.954,37.146 27.8,36.3 v1(28.904,36.3)
ETH_TXD0: U3.128 U5.17 | length 14.9
  Top Layer w0.127: U5.17@22.212,46.098 23.511,44.8 v1(26.3,44.8) ; U3.128@27.374,36.185 v1(28.189,37)
  Int2 w0.127: v1(26.3,44.8) 27.2,44.8 28.189,43.811 v1(28.189,37)
ETH_TXD1: U3.74 U5.18 | length 41.8
  Top Layer w0.127: U3.74@22.071,14.512 22.089,14.512 24.708,11.892 25.008,11.892 v1(25.1,11.8) ; U5.18@22.566,46.452 23.718,45.3 v1(25.7,45.3)
  Int2 w0.127: v1(25.1,11.8) 24.705,12.195 24.705,33.32 24.705,35.405 25.2,35.9 25.2,44.8 v1(25.7,45.3)
GND: C1.2 C2.2 C3.2 C4.2 C5.2 C6.2 C7.1 C8.2 C9.1 C10.2 C11.1 C12.1 C13.1 C14.1 C15.1 C16.1 C17.1 C18.1 C19.1 C20.2 C21.2 C22.1 C23.1 C24.2 C25.2 C26.1 C27.1 C28.1 C29.1 C33.1 C34.1 D1.2 D5.2 J1.3 J1.5 J1.9 J2.A1/B12 J2.A12/B1 J3.7 J3.8 Q1.2 Q2.2 Q3.2 R5.1 R10.1 R19.1 R26.2 R27.1 R30.2 SW1.1 SW3.6 SW4.6 U3.16 U3.31 U3.38 U3.51 U3.61 U3.83 U3.94 U3.107 U3.120 U3.130 U4.0 U4.2 U5.0 U6.4 X1.2 X2.2 X2.3 | length 33.3
  Top Layer w0.127: v1(5.8,25.174) 5.8,25.196 6.762,26.158 U3.38@6.762,26.179 ; U6.4@8.795,36.167 8.795,36.005 v1(9,35.8) ; v1(9.6,51.2) SW1.1@9.6,52 ; SW1.1@9.7,46 v1(9.7,46.4) ; U3.51@11.358,21.583 12.1,22.325 v1(12.495,22.325) v1@12.5,22.33 ; U5.0@20.25,47 v2(20.275,46.975) ; U3.130@26.667,36.892 27.35,37.575 v1(29.05,37.575) ; U3.120@30.203,33.356 31.101,34.255 31.33,34.255 v1(33.275,36.2) ; v1(33.5,48.8) D5.2@33.5,49.05 ; U3.107@33.738,26.179 34.967,24.95 35.462,24.95 v1(35.469,24.957) v1@35.525,24.901
  Top Layer w0.254: v1(7.2,32.211) U3.31@8.176,31.235 ; v1(10.042,39.43) 11.138,38.334 11.684,38.334 U3.16@13.479,36.538 ; U4.2@11,8.475 11,9.75 U4.0@11.75,10.5 ; U3.61@14.894,18.047 16.446,19.6 v1(16.475,19.6) ; v1(22.475,18.525) 24.396,18.525 25.227,17.694 U3.83@25.253,17.694 ; v1(26.495,22.925) 27.8,22.925 U3.94@29.142,21.583 ; v1(26.73,1.17) J1.3@26.73,2 ; v1(28,1.2) J1.5@28,2 ; v1(30.54,1.26) J1.9@30.54,2
  other v1: 8.55,6.2 14.95,6.2 10.825,9.575 11.425,9.575 12.025,9.575 11.125,10.1 11.725,10.1 20.275,45.975 21.275,47 20.25,47.975
JTDI: U3.110
LED1: J4.6 U5.3 | length 28
  Top Layer w0.127: v1(17,51.6) 17,50.604 U5.3@18.995,48.609
  Int1 w0.127: v1(17,51.6) 17.5,52.1 22.359,52.1 23.405,51.054 32.485,51.054 35.339,48.2 37.52,48.2 J4.6@38.79,46.93
LED2: J4.5 U5.2 | length 23.8
  Top Layer w0.127: v1(17.786,51.4) 17.786,50.524 U5.2@19.348,48.962
  Int1 w0.127: v1(17.786,51.4) 18.1,51.4 18.546,51.846 22.254,51.846 23.3,50.8 32.38,50.8 J4.5@36.25,46.93
LED_G: Q2.1 U3.46 | length 18
  Top Layer w0.127: U3.46@9.59,23.351 10.386,24.146 12.446,24.146 13.146,24.846 14.579,24.846 16.35,23.075 v1(19.695,23.075)
  Int2 w0.127: v1(19.695,23.075) v1(19.695,29.57)
LED_R: Q1.1 U3.75 | length 15.2
  Top Layer w0.127: v1(20.755,16.9) 20.775,16.88 20.775,16.515 U3.75@22.424,14.865
  Int2 w0.127: v1(20.75,24.4) 20.752,24.398 20.752,16.907 20.75,16.905 v1(20.755,16.9)
  Bottom Layer w0.127: Q1.1@16.656,26.588 18.844,24.4 v1(20.75,24.4)
LED_Y: Q3.1 U3.142 | length 11.8
  Top Layer w0.127: U3.142@22.424,41.135 21.225,39.935 21.225,36.57 24.27,33.525 v1(25.2,33.525)
  Bottom Layer w0.127: Q3.1@24.956,34.888 25.115,34.729 25.115,33.61 v1(25.2,33.525)
NetC6_1: C6.1 U3.106 | length 4.2
  Top Layer w0.254: v1(29.55,26.115) 29.55,26.175 29.736,26.361 32.823,26.361 33.359,25.826 U3.106@33.385,25.826
NetC12_2: C12.2 C13.2 C14.2 L1.1 U3.32 U3.33 | length 11.4
  Top Layer w0.254: U3.33@7.469,30.528 9.297,28.7 v1(9.625,28.7) 9.557,28.768 9.557,29.147 U3.32@7.823,30.881
  Bottom Layer w0.254: C12.2@9.5,28.5 C13.2@10.75,29.75 C14.2@12,31 13.314,32.314 L1.1@13.314,32.436
NetC15_2: C15.2 U3.71 | length 2.4
  Top Layer w0.254: v1(17.175,12.675) 17.175,13.258 U3.71@18.429,14.512
NetC26_2: C26.2 C27.2 U5.6 | length 8.7
  Top Layer w0.127: v1(16.607,48.034) 16.673,48.1 17.382,48.1 U5.6@17.934,47.548
  Int2 w0.127: v1(15.346,44.421) 15.346,44.519 16.695,45.868 16.695,47.946 v1(16.607,48.034)
  Bottom Layer w0.127: C26.2@14.246,41.954 15.346,43.054 C27.2@15.346,43.846 v1(15.346,44.421)
NetD2_1: D2.1 Q1.3 | length 35.8
  Int1 w0.127: v1(14.025,26.65) 14.071,26.696 14.52,26.696 14.645,26.82 16.53,26.82 17.125,26.225 v1(18.705,26.225)
  Int2 w0.127: v1(18.705,26.225) 18.705,29.007 18.9,29.202 18.9,35.13 19.2,35.43 19.2,39.4 18.175,40.425 18.175,41.78 18.105,41.85 18.105,43.655 18.536,44.086 18.536,51.974 18.405,52.105 18.405,54.23 v1(18.875,54.7)
  Bottom Layer w0.127: v1(14.025,26.65) 14.025,26.805 14.375,27.155 14.375,27.525 Q1.3@14.216,27.684
NetD2_2: D2.2 R21.1
  other v1: 18.9,53.2
NetD3_1: D3.1 Q2.3 | length 30
  Int1 w0.127: v1(17.525,54.7) 18.12,54.7 18.616,54.205 19.905,54.205 v1(20.425,54.725)
  Int2 w0.127: v1(16.916,30.009) 16.916,35.334 15.975,36.275 15.975,41.55 17.025,42.6 17.025,44.65 18.282,45.907 18.282,51.868 17.525,52.625 v1(17.525,54.7)
  Bottom Layer w0.127: v1(16.916,30.009) Q2.3@16.916,30.384
NetD3_2: D3.2 R22.1
  other v1: 20.4,53.2
NetD4_1: D4.1 Q3.3 | length 20.8
  Int2 w0.127: v1(21.925,54.7) 22.625,54 22.625,51.55 23.725,50.45 23.725,38.5 23.005,37.78 23.005,36.999 23.284,36.72 v1(23.284,35.984)
  Bottom Layer w0.127: Q3.3@22.516,35.984 22.675,35.825 23.045,35.825 23.204,35.984 v1(23.284,35.984)
NetD4_2: D4.2 R23.1
  other v1: 21.9,53.2